# Altium PCB HU_revC.PcbDoc (part 4 of 5)
Units mm, origin at the board's own origin, x right, y up, seen from the top; angles counter-clockwise.
Board outline 391 x 236 mm, 6 copper layers (Top Layer, Layer 1, Layer 2, Layer 3, Layer 4, Bottom Layer), stack 1.538 mm thick; 737 components, 574 nets, 2599 pads, 143 vias.
Unrouted connection lines stored in the file: 1682.
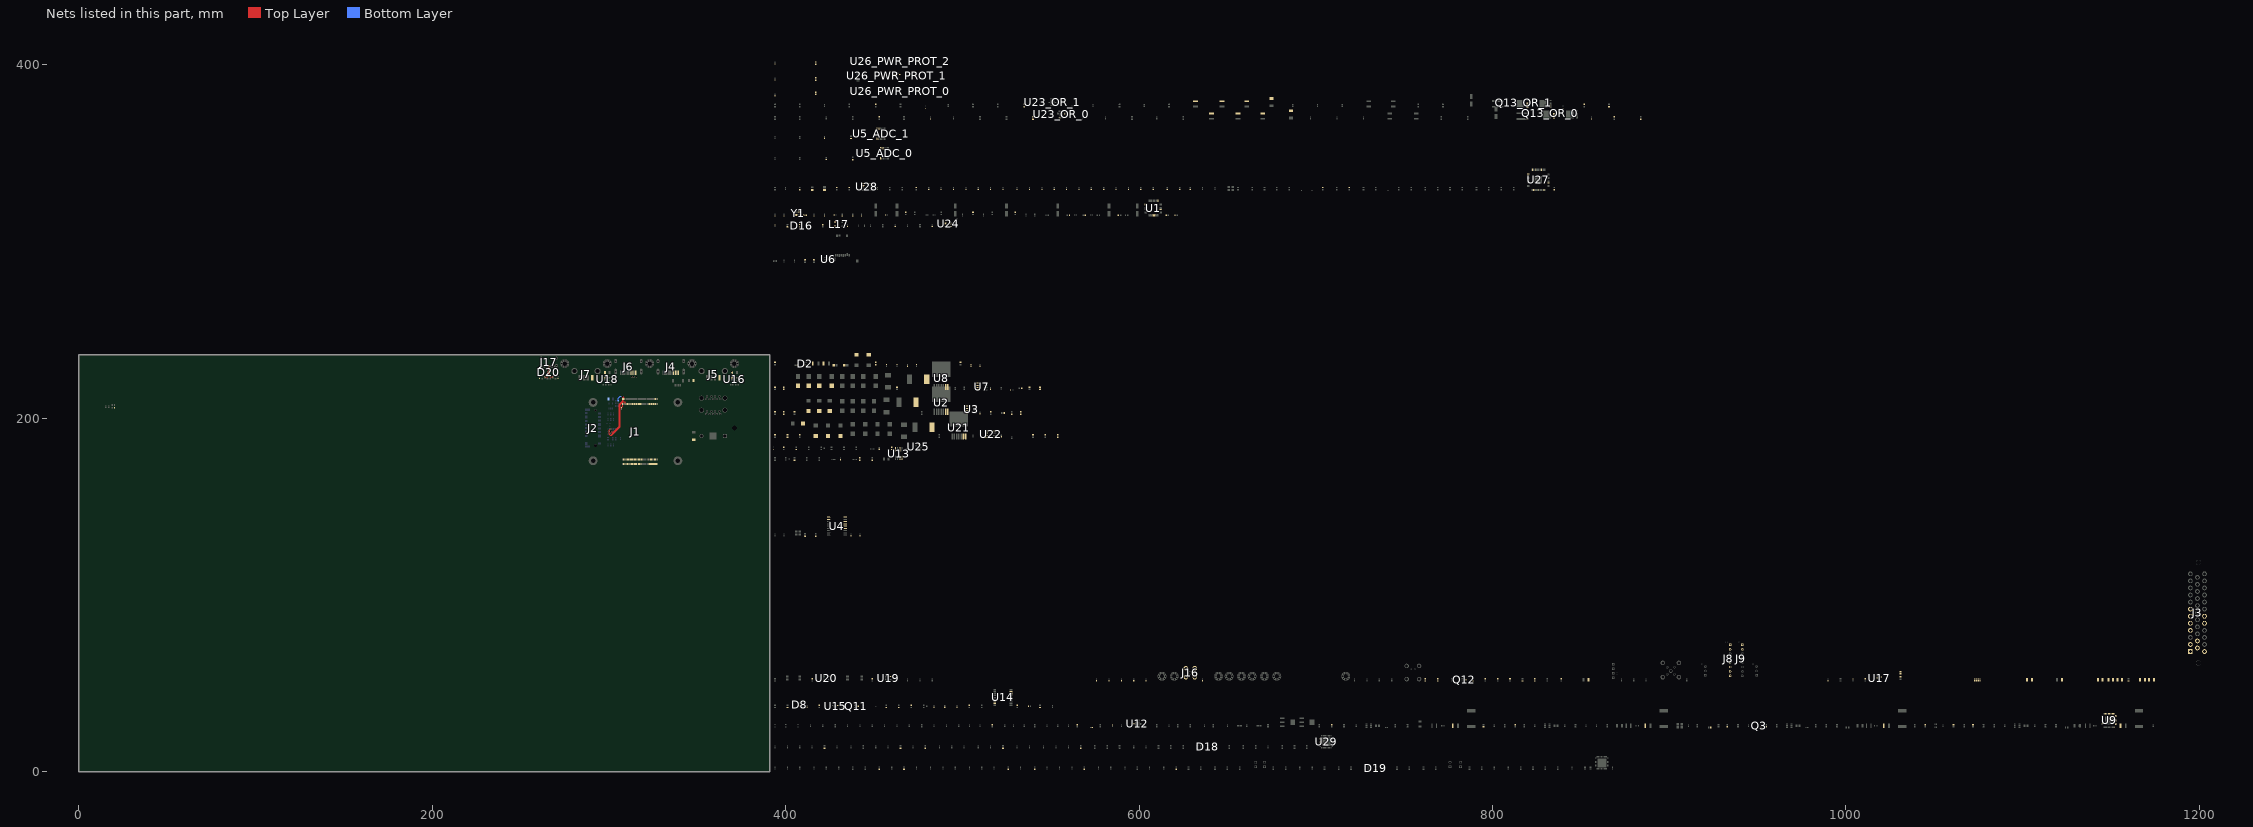
[diagram p3: the nets of this part, all layers, seen from the top]

## Part data (continued)
U15: library part CMP-09116-000039-1, "IC OPAMP GP 1 CIRCUIT 6DFN", Case/Package=DFN, Input Bias Current=12nA, Input Offset Voltage (Vos)=1.2mV, Max Operating Temperature=85°C, Max Supply Voltage=18V, Min Operating Temperature=-40°C, Min Supply Voltage=1.8V, Operating Supply Current=20uA, Output Current per Channel=10mA, Package Quantity=1, Power Supply Rejection Ratio (PSRR)=86dB, Voltage Gain=120dB, Bandwidth=60kHz, Common Mode Rejection Ratio=68dB, Gain Bandwidth Product=60kHz, Lead Free="Lead Free", Mount="Surface Mount", Number of Amplifiers=1, Number of Circuits=1, Number of Elements=1, Number of Pins=6, Packaging="Tape and Reel", REACH SVHC="No SVHC", Slew Rate=0.018V/µs, Unity Gain Bandwidth Product=60kHz
U17: library part CMP-016-00017-1, "Single 2-Input NAND Gate, Schmitt Trigger , Open Drain"
U21: library part CMP-0069-00194-3, "SIMPLE SWITCHER® High Efficiency 5A Step-Down Voltage Regulator, 7-pin TO-263", Manufacturer="Texas Instruments", PackageTopMarking=NSUZXYTTE#*LM2678*S-12, PowerWise=N, Code_JEDEC=MO-169-AC, ComponentLink1Description="Datasheet URL", ComponentLink1URL=http://www.ti.com/general/docs/lit/getliterature.tsp?genericPartNumber=LM2678&fileType=pdf, CompType=Switcher, PackageDescription="TO-263, Molded, .400 x .390 x .180in Body, 7 Lead, .050in Pitch, Surface Mount", PackageReference=KTW0007B, PinCount=7, RoHS=N
U23_OR_0 U23_OR_1: library part CMP-019-00057-1, "Automotive ideal diode with circuit breaker, 200-kHz ACS, UV , OV protection and SLEEP mode 24-VQFN -40 to 125", Case/Package=VQFN, Pins=24
U24: library part CMP-318-000000-2, "Automotive CAN FD transceiver with watchdog, bus diagnostics and partial networking via sele 14-SOT-23-THIN -40 to 150", Component Type=Standard, Design Item ID=CMP-015-00012-2, Pin Count=14, Source=TCAN1146DYYRQ1.SchLib
U25: library part CMP-1557-00002-1, "Hall Effect Linear Current Sensor with Overcurrent Fault Output for <100 V Isolation Applications, 3 to 5.5 V, -31 to 31 A IP, -40 to 125 degC, 12-Pin QFN (EX), RoHS, Tape and Reel", Temperature Max="125 degC", Temperature Min="-40 degC", -3db Bandwidth="0.1 MHz", ComponentLink1Description="Manufacturer URL", ComponentLink1URL=http://www.allegromicro.com/, ComponentLink2Description=Datasheet, ComponentLink2URL=http://www.allegromicro.com/~/media/Files/Datasheets/ACS711-Datasheet.ashx?la=en, ComponentLink3Description="Package Specification", ComponentLink3URL=http://www.allegromicro.com/~/media/Files/Datasheets/ACS711-Datasheet.ashx?la=en, DatasheetVersion="Rev. 3", IP Max="31 A", IP Min="-31 A", Mounting Technology="Surface Mount", PackageDescription="12-Pin Quad Flat No-Lead, Body 3 x 3 mm, Height 0.8 mm", Packing="Tape and Reel", PartNumber=ACS711KEXLT-31AB-T, RoHS=TRUE, VCC Max="5.5 V", VCC Min="3 V"
U26_PWR_PROT_0 U26_PWR_PROT_1 U26_PWR_PROT_2: library part CMP-1557-00001-1, "Hall Effect Linear Current Sensor with Overcurrent Fault Output for <100 V Isolation Applications, 3 to 5.5 V, -15.5 to 15.5 A IP, -40 to 125 degC, 12-Pin QFN (EX), RoHS, Tape and Reel", Temperature Max="125 degC", Temperature Min="-40 degC", -3db Bandwidth="0.1 MHz", ComponentLink1Description="Manufacturer URL", ComponentLink1URL=http://www.allegromicro.com/, ComponentLink2Description=Datasheet, ComponentLink2URL=http://www.allegromicro.com/~/media/Files/Datasheets/ACS711-Datasheet.ashx?la=en, ComponentLink3Description="Package Specification", ComponentLink3URL=http://www.allegromicro.com/~/media/Files/Datasheets/ACS711-Datasheet.ashx?la=en, DatasheetVersion="Rev. 3", IP Max="15.5 A", IP Min="-15.5 A", Mounting Technology="Surface Mount", PackageDescription="12-Pin Quad Flat No-Lead, Body 3 x 3 mm, Height 0.8 mm", Packing="Tape and Reel", PartNumber=ACS711KEXLT-15AB-T, RoHS=TRUE, VCC Max="5.5 V", VCC Min="3 V"
U27: library part CMP-015-00024-1, "IC USB 2.0 4PORT HUB 64HTQFP USB Hub Controller USB 2.0 USB Interface 64-HTQFP (10x10)", Max Operating Temperature=85°C, Min Operating Temperature=-40°C, Pins=64
U28: library part CMP-0136-00217-1, "1A, Low Voltage, Low Quiescent Current LDO Regulator, 8-Pin SOIC 150mil, Extended Temperature, Tape and Reel", Code_IPC=SOIC127P600-8, Code_JEDEC=MS-012, DatasheetVersion="revC, Aug-2007", PackageDescription="8-Lead Plastic Small Outline (SN) - Narrow, 3.90mm Body [SOIC]", PackageReference=SOIC-SN8, PackageVersion="revBB, Aug-2009"
U29: library part CMP-015-00022-4, "LAN8830 Series RGMII Interface Gigabit Ethernet Transceiver - VQFN-48", Case/Package=VQFN, Pins=48
U30: library part CMP-015-00023-4, "100/1000BASE-T1 Rgmii/sgmii Phy", Case/Package=VQFN, Pins=48
Y1: library part CMP-27762-015492-1, "Crystal 12MHz ±20ppm (Tol) ±20ppm (Stability) 8pF FUND 120Ω 4-Pin SMD T/R"
Y2: library part CMP-27762-001115-1, "XTAL OSC XO 32.7680KHZ CMOS SMD", Case/Package=CSMD, Frequency=32.768kHz, Frequency Stability=25ppm, Load Capacitance=15pF, Max Operating Temperature=85°C, Max Supply Current=3.5mA, Min Operating Temperature=-40°C, Min Supply Voltage=2.97V, Operating Supply Voltage=3.3V, Depth=2mm, Height=0.037inch, Lead Free="Lead Free", Length=2.5mm, Mount="Surface Mount", Number of Pins=4, Packaging="Tape and Reel", Radiation Hardening=No, Series=ASDK, Termination=SMD/SMT, Width=0.079inch
Y3: library part CMP-27762-015134-1, "Crystal 16MHz ±30ppm (Tol) ±30ppm (Stability) 10pF FUND 80Ω 4-Pin SMD T/R", Case/Package=SMD/SMT, ESR (Equivalent Series Resistance)=80R, Frequency=16MHz, Frequency Stability=30ppm, Load Capacitance=10pF, Max Operating Temperature=60°C, Min Operating Temperature=-10°C, Depth=2.5mm, Frequency Tolerance=30ppm, Height=0.039inch, Lead Free="Lead Free", Length=3.2mm, Mount="Surface Mount", Number of Pins=4, Packaging="Tape and Reel", REACH SVHC="No SVHC", Series=ABM8G, Series Resistance=80R, Width=0.098inch
Y4 Y6 Y7: library part CMP-2000-05733-3, "Crystal 25MHz ±20ppm (Tol) ±30ppm (Stability) 18pF FUND 60Ω 4-Pin SMD T/R", Case/Package=CSMD, ESR (Equivalent Series Resistance)=60R, Frequency=25MHz, Frequency Stability=30ppm, Frequency Tolerance=20ppm, Load Capacitance=18pF, Max Operating Temperature=85°C, Min Operating Temperature=-40°C, Operating Frequency="25 MHz", Package Quantity=1000, Depth=2.5mm, Height=0.039inch, Lead Free="Lead Free", Length=3.2mm, Mount="Surface Mount", Number of Pins=4, Packaging="Tape and Reel", Radiation Hardening=No, Series=ABM8G, Series Resistance=60R, Termination=SMD/SMT, Tolerance=20ppm, Width=0.098inch
Y5: library part CMP-27762-003871-2, "Crystal 24MHz ±20ppm (Tol) ±30ppm (Stability) 18pF FUND 60Ω 4-Pin SMD T/R", Case/Package=CSMD, ESR (Equivalent Series Resistance)=60R, Frequency=24MHz, Frequency Stability=30ppm, Frequency Tolerance=20ppm, Load Capacitance=18pF, Max Operating Temperature=85°C, Min Operating Temperature=-40°C, Operating Frequency="24 MHz", Package Quantity=1000, Depth=2.5mm, Height=0.039inch, Lead Free="Lead Free", Length=3.2mm, Mount="Surface Mount", Number of Pins=4, Packaging="Tape and Reel", Radiation Hardening=No, Series=ABM8G, Series Resistance=60R, Termination=SMD/SMT, Tolerance=20ppm, Width=0.098inch

## Via types
v1: diameter 0.5, hole 0.3, Top Layer to Bottom Layer, 143 vias

## Nets (pads, with @x,y where several pads share a name; then routed paths per layer and width w, separated by ;. In a path a pad name is that pad's centre, name@x,y a point inside that pad or via, vN(x,y) a via of type N, cw(c..) or ccw(c..) an arc to the next point about the centre after c; other vN are vias at no path point)
1V1: R256.1 R257.1 R260.1 R282.1 R284.1 R285.1
1V1_USB: C179.1 C180.1 C181.1 C182.1 C183.1 C184.1 C185.1 C186.1 C187.1 C188.1 C189.1 C190.1 C191.1 C192.1 C195.1 R239.2 U27.19 U27.25 U27.37 U27.45 U27.53 U27.60 U27.63 U28.8
1V8_ETH_SYNC: J1.18
3V3: D18.2 D18.3 D19.2 D19.3 R255.1 R258.1 R286.1 R287.1 R288.1
3V3_3V3_MAIN_T_SENSE: R62.2 R64.2
3V3_3V3_MAIN_V_SENSE: R68.1 R69.2
3V3_3V3_VCC_I_nFLT: R213_PWR_PROT_2.1 U26_PWR_PROT_2.6
3V3_3V3_VCC_I_SENSE: U26_PWR_PROT_2.11
3V3_5V0_MAIN_T_SENSE: R33.2 R36.2
3V3_5V0_MAIN_V_SENSE: R39.1 R40.2
3V3_5V0_VCC_I_nFLT: R213_PWR_PROT_1.1 U26_PWR_PROT_1.6
3V3_5V0_VCC_I_SENSE: U26_PWR_PROT_1.11
3V3_12V_MAIN_T_SENSE: R179.2 R181.2
3V3_12V_MAIN_V_SENSE: R185.1 R186.2
3V3_12V_VCC_I_nFLT: R213_PWR_PROT_0.1 U26_PWR_PROT_0.6
3V3_12V_VCC_I_SENSE: U26_PWR_PROT_0.11
3V3_AMP_I_nFLT: R119.1 U13.6
3V3_AMP_I_SENSE: R118.1
3V3_AMP_PWR_EN: R122.1
3V3_APM_OR_nFLT: R194_OR_1.1 U23_OR_1.12
3V3_AUX: C25.1 C55.1 C114.1 C138.1 F1.1 F11.2 F12.2 F14.2 Q3.1 Q3.4 R33.1 R38.2 R62.1 R67.2 R68.2 R79.2 R89.1 R119.2 R144.1 R179.1 R184.2 U3.8 U7.1 U7.2 U7.8 U13.8 U22.8
3V3_CAM_GPIO0: J1.97 R99.1 U9.11
3V3_CAM_GPIO1: J1.100
3V3_CAN_RX: U4.2 U24.4
3V3_CAN_TX: U4.1 U24.1
3V3_CAR_APM_I_SENSE: D14_OR_1.1 R198_OR_1.2 U23_OR_1.10
3V3_CAR_APM_V_SENSE: D11_OR_1.1 R187_OR_1.1 R188_OR_1.2
3V3_CAR_OR_nFLT: R194_OR_0.1 U23_OR_0.12
3V3_CAR_VCC_I_SENSE: D14_OR_0.1 R198_OR_0.2 U23_OR_0.10
3V3_CAR_VCC_INH: U17.2
3V3_CAR_VCC_nINH: R137.1 U17.4
3V3_CAR_VCC_V_SENSE: D11_OR_0.1 R187_OR_0.1 R188_OR_0.2
3V3_CPU_FAN_TACHO: J1.16 R156.2 R160.2
3V3_EEPROM_nWP: J1.20 R22.1
3V3_GPIO22: J1.46
3V3_GPIO23: J1.47
3V3_GPIO24: J1.45
3V3_GPIO26: J1.24
3V3_I2C0_SCL: J1.80 U9.29 U12.4
3V3_I2C0_SDA: J1.82 U9.28 U12.5
3V3_ID_SC: J1.35
3V3_ID_SD: J1.36
3V3_INPUT_I_SENSE: U25.11
3V3_INPUT_nI_FLT: R206.1 U25.6
3V3_INPUT_V_SENSE: D17.1 R211.1 R212.2
3V3_INT: C90.2 C91.2 C161.1 C167.1 C168_PWR_PROT_0.1 C168_PWR_PROT_1.1 C168_PWR_PROT_2.1 R113.2 R115.2 R194_OR_0.2 R194_OR_1.2 R206.2 R213_PWR_PROT_0.2 R213_PWR_PROT_1.2 R213_PWR_PROT_2.2 U12.2 U12.15 U24.5 U25.12 U26_PWR_PROT_0.12 U26_PWR_PROT_1.12 U26_PWR_PROT_2.12
3V3_MAIN: C119.1 D2.2 D2.3 J1.84 J1.86 R24.2 R160.1 R162.1 U17.5
3V3_MAX96724_0_EN_RF_A: R76.2
3V3_MAX96724_0_EN_RF_B: R91.2
3V3_MAX96724_0_EN_RF_C: R97.2
3V3_MAX96724_0_EN_RF_D: R104.2
3V3_MAX96724_nERRB: R87.1 U9.14
3V3_MAX96724_nLOCK: R78.2 U9.13
3V3_MISC: C46.1 C47.1 C50_ADC_0.1 C50_ADC_1.1 C115.1 C116.1 C118.1 D8.2 D8.3 F14.1 R56.1 R57.1 R58_ADC_0.1 R58_ADC_1.1 R59.2 R125.1 R131.1 U4.18 U5_ADC_0.2 U5_ADC_1.2 U6.5 U14.7 U14.8 U15.6
3V3_nBT_INH: J1.91 R26.2
3V3_nETH_G_LED: J1.17
3V3_nETH_Y_LED: J1.15
3V3_nLED_PWR: J1.95 R31.2
3V3_nRPI_BOOT: J1.93 R28.2
3V3_nWIFI_INH: J1.89 R25.2
3V3_OTG_ID: J1.101 R30.2 | length 2.5
  Top Layer w0.2: R30.2@307,206 307.7,206.7 J1.101@307.7,208.18
3V3_PCIE_nCLKREQ: J1.102 R42.2 | length 22.1
  Top Layer w0.2: v1(301,192.5) 302.75,192.5 305.711,195.461 305.711,207.961 307.7,209.95 J1.102@307.7,210.82
3V3_PCIE_nRST: J1.109 R41.2 | length 28.9
  Top Layer w0.2: v1(301,194) 300.25,193.25 300.25,191.043 300.793,190.5 301.567,190.5 306.289,195.222 306.289,207.722 308.067,209.5 309,209.5 309.3,209.2 J1.109@309.3,208.18
3V3_PCIE_nWAKE: J1.104 R43.2 | length 23.1
  Top Layer w0.2: v1(301,191) 301.659,191 306,195.341 306,207.841 308.1,209.941 J1.104@308.1,210.82
3V3_PCIE_PWR_EN: J1.106 R50.2 | length 6.4
  Top Layer w0.2: v1(307.5,212.25) 308,212.25 308.5,211.75 J1.106@308.5,210.82
  Bottom Layer w0.3: R50.2@305.15,210 305.15,211.4 306.25,212.5 307.224,212.5 307.474,212.25 v1(307.5,212.25)
"3V3_PWM0_CH0 (GPIO12)": J1.31 R159.1
"3V3_PWM0_CH1 (GPIO13)": J1.28 R157.2 R158.2 R162.2
3V3_REG_EN: D5.1 R63.2 U8.7
3V3_REG_FB: C61.1 C62.1 C63.1 C64.1 L2.2 U7.3 U7.4 U8.6
3V3_SD_PWR_EN: J1.75 R60.2
"3V3_SPI0_MISO (GPIO9)": J1.40 U4.15
"3V3_SPI0_MOSI (GPIO10)": J1.44 U4.14
"3V3_SPI0_nCS0 (GPIO8)": J1.39 U4.16
"3V3_SPI0_nCS2 (GPIO3)": J1.56 R146.2
"3V3_SPI0_nCS3 (GPIO2)": J1.58 R148.2
"3V3_SPI0_SCLK (GPIO11)": J1.38 U4.13
"3V3_SPI1_MISO (GPIO19)": J1.26 R141.2 U5_ADC_0.15 U5_ADC_1.15
"3V3_SPI1_MOSI (GPIO20)": J1.27 R140.2 U5_ADC_0.14 U5_ADC_1.14
"3V3_SPI1_nCS0 (GPIO18)": J1.49 U5_ADC_0.1
"3V3_SPI1_nCS1 (GPIO27)": J1.48 R23.2 U5_ADC_1.1
"3V3_SPI1_nCS1_ALT (GPIO27)": J1.50 R23.1
"3V3_SPI1_nCS2 (GPIO16)": J1.29 R143.2
"3V3_SPI1_SCLK (GPIO21)": J1.25 R142.2 U5_ADC_0.16 U5_ADC_1.16
"3V3_SPI3_MISO (GPIO5)": J1.34
"3V3_SPI3_MOSI (GPIO6)": J1.30
"3V3_SPI3_nCS0 (GPIO4)": J1.54
"3V3_SPI3_nCS1 (GPIO8)": J1.41
"3V3_SPI3_SCLK (GPIO7)": J1.37
3V3_TCAN1146_MISO: R141.1 U24.6
3V3_TCAN1146_MOSI: R140.1 U24.11
3V3_TCAN1146_nCS: R143.1 U24.14
3V3_TCAN1146_SCLK: R142.1 U24.8
"3V3_UART0_RX (GPIO15)": J1.51 R163.1
"3V3_UART0_TX (GPIO14)": J1.55 R164.1
3V3_USB: C171.1 C172.1 C173.1 C174.1 C175.1 C176.1 C177.1 C178.1 C194.1 F11.1 R226.2 R228.2 R235.2 R238.2 R240.1 U27.2 U27.20 U27.31 U27.48 U28.1 U28.2
3V3_VBAT: D1.1 J1.76
3V3_VBUS_EN: J1.111 R175.2 R177.2
5V0_DAC: C11.1 C12.1 C13.1 C14.1 C15.1 C16.1 F8.1 R5.2 R9.2 R12.2 R15.2 U1.21 U1.27 U1.37
5V0_DISP: F10.1 F13.1 F15.1
  other v1: 369.5,225.5 369.5,226.5
5V0_HDMI0_CEC: J1.151 J4.13
5V0_HDMI0_HOTP: J1.153 J4.19
5V0_HDMI0_SCL: J1.200 J4.15
5V0_HDMI0_SDA: J1.199 J4.16
5V0_HDMI1_CEC: J1.149 J6.13
  other v1: 312.75,223.5
5V0_HDMI1_HOTP: J1.143 J6.19
  other v1: 315.5,223.5
5V0_HDMI1_SCL: J1.147 J6.15
  other v1: 313.5,223.5
5V0_HDMI1_SDA: J1.145 J6.16
  other v1: 314.15,223.5
5V0_INT: C160.1 U24.3
5V0_MAIN: F8.2 F9.2 F10.2 F16.2 F17.2 R39.2 R154.1 R155.1 U3.3 U3.4
5V0_MISC: U19.5 U20.5
5V0_nLED_ACT: J1.21 R32.2
5V0_nPWR_BTN: J1.92 R27.1
5V0_PMIC_EN: J1.99 R29.1
5V0_RPI: C19.2 C20.2 C21.1 C22.1 C23.1 C24.1 F9.1 J1.77 J1.79 J1.81 J1.83 J1.85 J1.87 R29.2 R214.1
5V0_USB2_CC1: J1.94 R167.1
5V0_USB2_CC2: J1.96 R168.1
5V_REG_EN: R34.1 R35.2 U2.7
5V_REG_FB: C31.1 C32.1 C33.1 L1.2 U2.6 U3.1 U3.2
12V0_MAIN: F7.2 R185.2 U22.3 U22.4
12V0_PoC: F2.1 F3.1 F4.1 F5.1 F7.1
12V0_REG_EN: D9.1 R180.2 U21.7
12V0_REG_FB: C144.1 C145.1 C146.1 C248.1 L16.2 U21.6 U22.1 U22.2
ACC_12V: J3.24
ACT_LED: J2.10 R49.2
AMBIENT_TEMP: R144.2 R145.2
AMP_VCC: J8.1 J8.2 J9.1 J9.2 U13.3 U13.4
ANT_DETECT: R134.2 U14.16
ANT_PWR_GATE: Q11.3 R126.2 R135.1
ANT_SENSE: R129.2 R130.1 U15.3
ANT_SHORT_N: C117.1 L15.1 R128.2 U14.17 U15.2
APM_VCC: C153_OR_1.2 C154_OR_1.2 C155_OR_1.2 D12_OR_1.2 Q13_OR_1.1-2-3 R147.2 U23_OR_1.2
BAT_12V: J3.1 J3.2 J3.13 J3.14
CAN_N: C164.1 D16.1 J3.29 L17.4 R204.2
CAN_P: C166.2 D16.2 J3.28 L17.1 R205.1
CAR_VCC: C153_OR_0.2 C154_OR_0.2 C155_OR_0.2 D12_OR_0.2 Q13_OR_0.1-2-3 U23_OR_0.2
CHA_FAN_PWM: Q12.3 R153.2 R155.2
"CM6206 _VBIAS": R19.2 U1.29
"CM6206 _X_N": C18.1 R21.1 U1.3 Y1.3
"CM6206 _X_P": C17.1 R21.2 U1.2 Y1.1
CM6206_REGV: C9.1 R1.1 U1.20
CM6206_USBD_N: R3.1 U1.19
CM6206_USBD_P: R2.1 U1.18
DBG_USB_N: C133.1 D20.4 D20.7 J17.A7 R166.1 | length 7.8
  Top Layer w0.158: C133.1@263.75,223.479 263.921,223.65 R166.1@265.25,223.65 265.558,223.958 265.716,223.958 265.821,224.064 265.821,225.071 265.632,225.26 265.632,225.268 265.5,225.4 D20.7@265.5,225.583 D20.4@265.5,226.417 265.5,226.6 265.632,226.732 265.632,226.74 265.821,226.929 265.821,229.179 J17.A7@265.75,229.25
DBG_USB_P: C132.1 D20.2 D20.9 J17.A6 R165.1 | length 7.8
  Top Layer w0.158: J17.A6@266.25,229.25 266.179,229.179 266.179,226.929 266.368,226.74 266.368,226.732 266.5,226.6 D20.2@266.5,226.417 D20.9@266.5,225.583 266.5,225.4 266.368,225.268 266.368,225.26 266.179,225.071 266.179,224.064 266.284,223.958 266.442,223.958 R165.1@266.75,223.65 268.079,223.65 C132.1@268.25,223.479
DISP0_5V: J4.18 J5.1 U16.1
DISP1_5V: J6.18 J7.1 U18.1
DPHY0_CK_N: J1.127 U9.40
DPHY0_CK_P: J1.129 U9.39
DPHY0_D0_N: J1.115 U9.32
DPHY0_D0_P: J1.117 U9.31
DPHY0_D1_N: J1.121 U9.36
DPHY0_D1_P: J1.123 U9.35
DPHY0_D2_N: J1.133 U9.38
DPHY0_D2_P: J1.135 U9.37
DPHY0_D3_N: J1.139 U9.42
DPHY0_D3_P: J1.141 U9.41
DPHY1_CK_N: J1.187 U9.46
DPHY1_CK_P: J1.189 U9.45
DPHY1_D0_N: J1.175 U9.44
DPHY1_D0_P: J1.177 U9.43
DPHY1_D1_N: J1.181 U9.48
DPHY1_D1_P: J1.183 U9.47
DPHY1_D2_N: J1.193 U9.50
DPHY1_D2_P: J1.195 U9.49
DPHY1_D3_N: J1.194 U9.54
DPHY1_D3_P: J1.196 U9.53
ETH_TRD0_N: J1.10 U29.3
ETH_TRD0_P: J1.12 U29.2
ETH_TRD1_N: J1.6 U29.6
ETH_TRD1_P: J1.4 U29.5
ETH_TRD2_N: J1.9 U29.8
ETH_TRD2_P: J1.11 U29.7
ETH_TRD3_N: J1.5 U29.11
ETH_TRD3_P: J1.3 U29.10
FAKRA_GND: C128.1 C129.1 C130.1 C131.1 J16.2
FL_N: J3.7 J8.5
FL_P: J3.6 J8.6
FR_N: J3.5 J8.7
FR_P: J3.4 J8.8